# Altium PCB pcb.PcbDoc
Units mm, origin at the board's own origin, x right, y up, seen from the top; angles counter-clockwise.
Board outline 17.02 x 21.59 mm, 2 copper layers (Top Layer, Bottom Layer); 2 components, 5 nets, 18 pads, 0 vias.
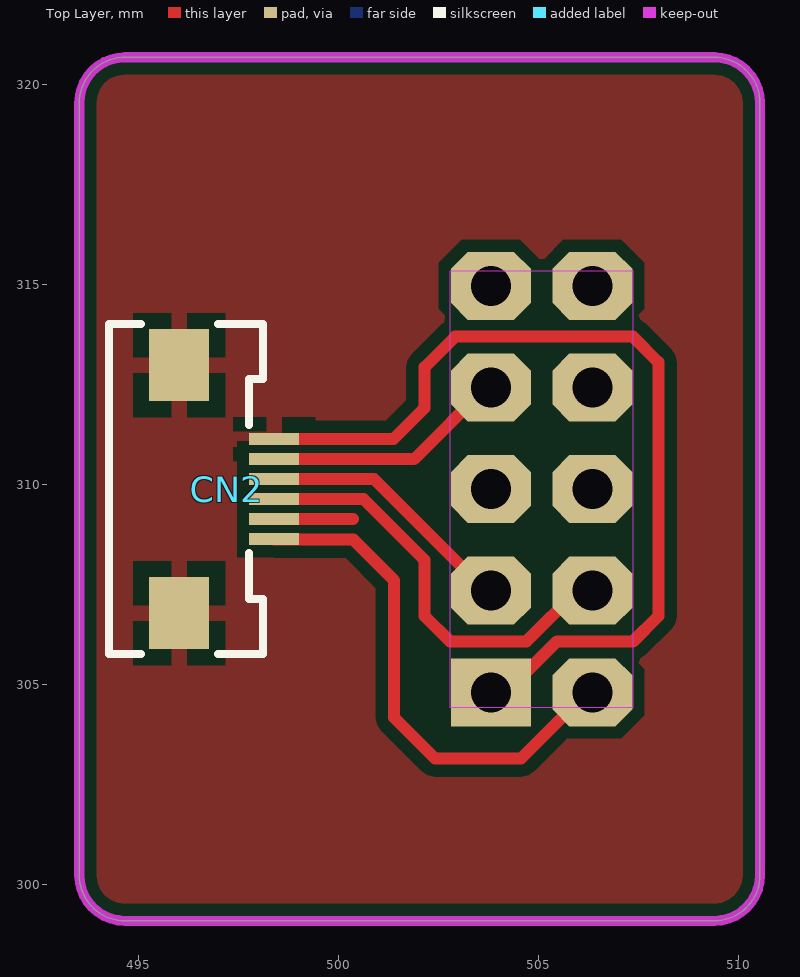
[diagram p0: Top Layer view]
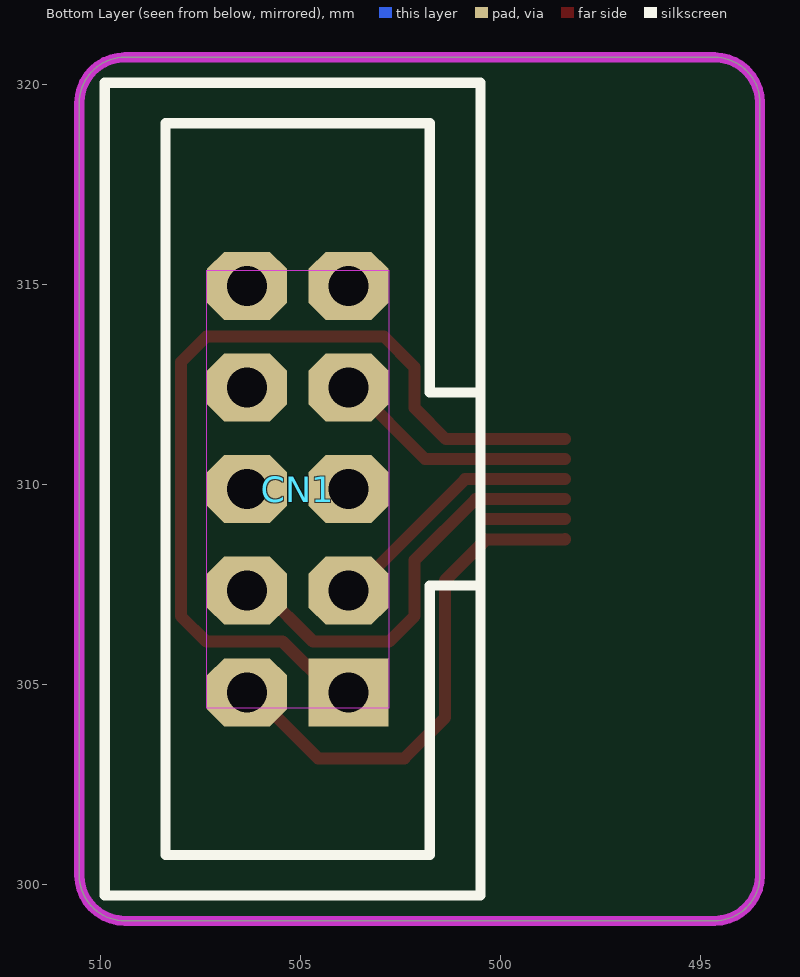
[diagram p1: Bottom Layer view, seen from below]

## Layer stack, top to bottom
Top Solder: solder mask 0.0102, Solder Resist, Dk 3.5
Top Layer: signal copper 0.0356
Dielectric1: dielectric 0.32, FR-4, Dk 4.8
Bottom Layer: signal copper 0.0356
Bottom Solder: solder mask 0.0102, Solder Resist, Dk 3.5

## Board outline
493.522,300.228 493.522,319.532 cw(c494.665,319.532) 494.665,320.675 509.397,320.675 cw(c509.397,319.532) 510.54,319.532 510.54,300.228 cw(c509.397,300.228) 509.397,299.085 494.665,299.085 cw(c494.665,300.228)

## Design rules (kind name [scope] priority, off if disabled: settings)
Clearance [All] p1: gap=0.3
FabricationTestPointUsage TestPointUsage [All] p1: valid=0 allowmultiple=FALSE
FabricationTestpoint Testpoint [All] p1: side=3 testpointundercomponent=TRUE minsize=1.016 maxsize=2.54 preferedsize=1.524 minholesize=0 maxholesize=1.016 preferedholesize=0.813 testpointgrid=0.025 allowsidetop=TRUE allowsidebottom=TRUE usegrid=TRUE gridtolerance=0
PolygonConnect [All] p1: connectstyle=Relief reliefconductorwidth=0.4 reliefentries=4 polygonreliefangle="90 Angle" airgapwidth=0.4
PolygonConnect PolygonConnect_1 [InNet('GND')] p2: connectstyle=Direct reliefconductorwidth=0.4 reliefentries=4 polygonreliefangle="90 Angle" airgapwidth=0.4
RoomDefinition sch [InComponentClass('sch')] p1: confinementstyle=ConfineIn formatcopy=TRUE lockcomponents=FALSE outline 411.074,271.424 617.296,271.424 617.296,366.903 411.074,366.903
RoutingVias [All] p1: holewidth=0.711 width=1.27 viastyle="Through Hole" minholewidth=0.711 minwidth=1.27 maxholewidth=0.711 maxwidth=1.27
SolderMaskExpansion [All] p1: expansion=0.102
UnpouredPolygon [All] p1: allowunpoured=FALSE
Width [All] p1: maxlimit=0.3 minlimit=0.3 preferedwidth=0.3
27 further rules are at their usual default settings.

## Components (designator, comment, footprint, x,y, rotation, side; value= is the part's Value field where it differs from the comment)
CN1 "IDC Connector" IDC10 503.809,304.8 r90 bottom locked
CN2 "JOINT TECH F0500WR-S-06PT" F0500WR-S-06PT 497.205,309.88 r270 top

## Footprints (in the part's own frame and the unit in brackets; to place one, negate y for a bottom-side part, rotate by r counter-clockwise, add the part's x,y. Pads: shape width x height; smd on the part's side, far side on the other; paste and mask are expansions set on the pad)
F0500WR-S-06PT [mm]
  rect 0.3x1.25 smd: 1(-1.25,1.188) 2(-0.75,1.188) 3(-0.25,1.188) 4(0.25,1.188) 5(0.75,1.188) 6(1.25,1.188)
  rect 1.8x1.5 smd: M1(-3.1,-1.187) M2(3.1,-1.187)
  silkscreen extent -4.13,-2.94 4.13,0.91
IDC10 [mm] "2.54mm, 10 Pin IDC Male Connector"
  rect 1.7x2 hole 1: 1(0,0)
  oct 1.7x2 hole 1: 2(0,2.54) 3(2.54,0) 4(2.54,2.54) 5(5.08,0) 6(5.08,2.54) 7(7.62,0) 8(7.62,2.54) 9(10.16,0) 10(10.16,2.54)
  silkscreen extent -5.08,-3.3 15.24,6.1, body extent -5.08,-3.38 15.24,6.1, height 9.27

## Part data
CN1: library part CN_5x2
CN2: "0.50mm Pitch FFC/FPC Connector, SMT, Right Angle, ZIF, Top Contact Style Receptacle, 6 Circuits"

## Nets (pads, with @x,y where several pads share a name; then routed paths per layer and width w, separated by ;. In a path a pad name is that pad's centre, name@x,y a point inside that pad or via, vN(x,y) a via of type N, cw(c..) or ccw(c..) an arc to the next point about the centre after c; other vN are vias at no path point)
3V3: CN1.2 CN2.6 | length 12.9
  Top Layer w0.3: CN2.6 498.393,308.618 500.372,308.618 501.396,307.594 501.396,304.165 502.412,303.149 504.571,303.149 506.222,304.8 CN1.2
GND: CN1.1 CN2.1 CN2.M1 CN2.M2 | length 22.9
  Top Layer w0.3: CN2.1 501.376,311.13 502.158,311.912 502.158,312.928 502.92,313.69 507.365,313.69 508,313.055 508,306.705 507.365,306.07 505.46,306.07 504.19,304.8 CN1.1
P2_1: CN1.4 CN2.4 | length 10.8
  Top Layer w0.3: CN2.4 500.63,309.63 502.158,308.102 502.158,306.705 502.793,306.07 504.698,306.07 505.968,307.34 CN1.4
P2_2: CN1.3 CN2.3 | length 6.6
  Top Layer w0.3: CN2.3 500.892,310.13 503.682,307.34 CN1.3
RESET: CN1.7 CN2.2 | length 6.2
  Top Layer w0.3: CN2.2 501.892,310.63 503.682,312.42 CN1.7
pads on no net: CN1.5 CN1.6 CN1.8 CN1.9 CN1.10 CN2.5
copper on no net: | length 2
  Top Layer w0.3: 498.393,309.13 500.368,309.13

## Polygon pours and split planes (outlines as drawn)
GND on Top Layer "Top Layer-No Net" (solid, pour order 2): 493.522,320.675 510.54,320.675 510.54,299.085 493.522,299.085

## Keep-outs
Keep-Out Layer:
  pour cut-out: 502.793,315.341 507.365,315.341 507.365,304.419 502.793,304.419
  lines w0.254: 493.522,300.228 ccw(c494.665,300.228) 494.665,299.085 509.397,299.085 ccw(c509.397,300.228) 510.54,300.228 510.54,319.532 ccw(c509.397,319.532) 509.397,320.675 494.665,320.675 ccw(c494.665,319.532) 493.522,319.532 493.522,300.228

## Silkscreen, mask and mechanical layers (free items; w line width, h text height)
Mechanical 16:
  lines w0.127: 358.9,260.26 363.98,260.26 ; 358.9,308.52 363.98,308.52 ; 358.9,356.78 363.98,356.78 ; 431.925,212 431.925,217.08 ; 431.925,399.96 431.925,405.04 ; 496.06,217.08 531.62,217.08 645.92,217.08 ; 504.95,212 504.95,217.08 ; 504.95,399.96 504.95,405.04 ; 526.007,217.105 526.032,217.08 ; 540.842,217.094 540.842,240.182 645.913,240.182 ; 540.868,232.664 645.887,232.664 ; 540.893,224.688 645.887,224.688 ; 559.823,217.094 559.823,224.688 ; 559.843,220.675 645.887,220.675 ; 577.975,212 577.975,217.08 ; 577.975,399.96 577.975,405.04 ; 591.363,217.145 591.363,224.663 ; 620.293,224.688 620.293,240.182 ; 635.318,232.664 635.318,240.179 ; 645.92,260.26 651,260.26 ; 645.92,308.52 651,308.52 ; 645.92,356.78 651,356.78 ; 645.92,217.08 363.98,217.08 363.98,399.96 645.92,399.96 645.92,242.353 645.92,217.08 ; 358.9,212 651,212 651,405.04 358.9,405.04 358.9,212
  text "1" at 395.146,401.611 h1.78
  text "2" at 467.79,401.611 h1.78
  text "3" at 540.942,401.611 h1.78
  text "4" at 613.84,401.611 h1.78
  text "A" at 360.805,378.599 h1.78
  text "A" at 647.825,378.599 h1.78
  text "B" at 360.805,330.542 h1.78
  text "B" at 647.825,330.542 h1.78
  text "C" at 360.805,282.028 h1.78
  text "C" at 647.825,282.028 h1.78
  text "PROJECT NAME:" at 541.757,238.176 h1.14
  text "REVISION:" at 621.207,238.176 h1.14
  text "A4" at 638.668,235.104 h2.29
  text "Project_Name" at 566.343,234.772 h2.54
  text "0.0.0" at 624.493,234.329 h1.78
  text "D" at 360.805,234.022 h1.78
  text "D" at 647.825,234.022 h1.78
  text "PROJECT NUMBER:" at 621.182,230.657 h1.14
  text "TITLE:" at 541.731,230.581 h1.14
  text "PCB_TITLE" at 571.55,226.619 h2.16
  text "ONW-000" at 628.668,226.48 h1.78
  text "DATE:" at 541.858,222.479 h1.14
  text "NAME_1" at 609.626,221.995 h1.52
  text "X" at 571.045,221.92 h1.52
  text "DRAWN BY:" at 592.43,221.919 h1.52
  text "of" at 574.728,221.844 h1.52
  text "Y" at 579.148,221.844 h1.52
  text "SHEET" at 561.266,221.818 h1.52
  text "DD-MM-YYYY" at 543.027,218.364 h1.52
  text "NAME_2" at 609.652,218.363 h1.52
  text "CHECKED BY:" at 592.405,218.236 h1.52
  text ".PCB_FILE_NAME_NO_PATH" at 561.165,218.211 h1.52
  text "1" at 395.146,213.651 h1.78
  text "2" at 467.79,213.651 h1.78
  text "3" at 540.942,213.651 h1.78
  text "4" at 613.84,213.651 h1.78